# EAGLE board board_0.2v (EAGLE 7.7.0)
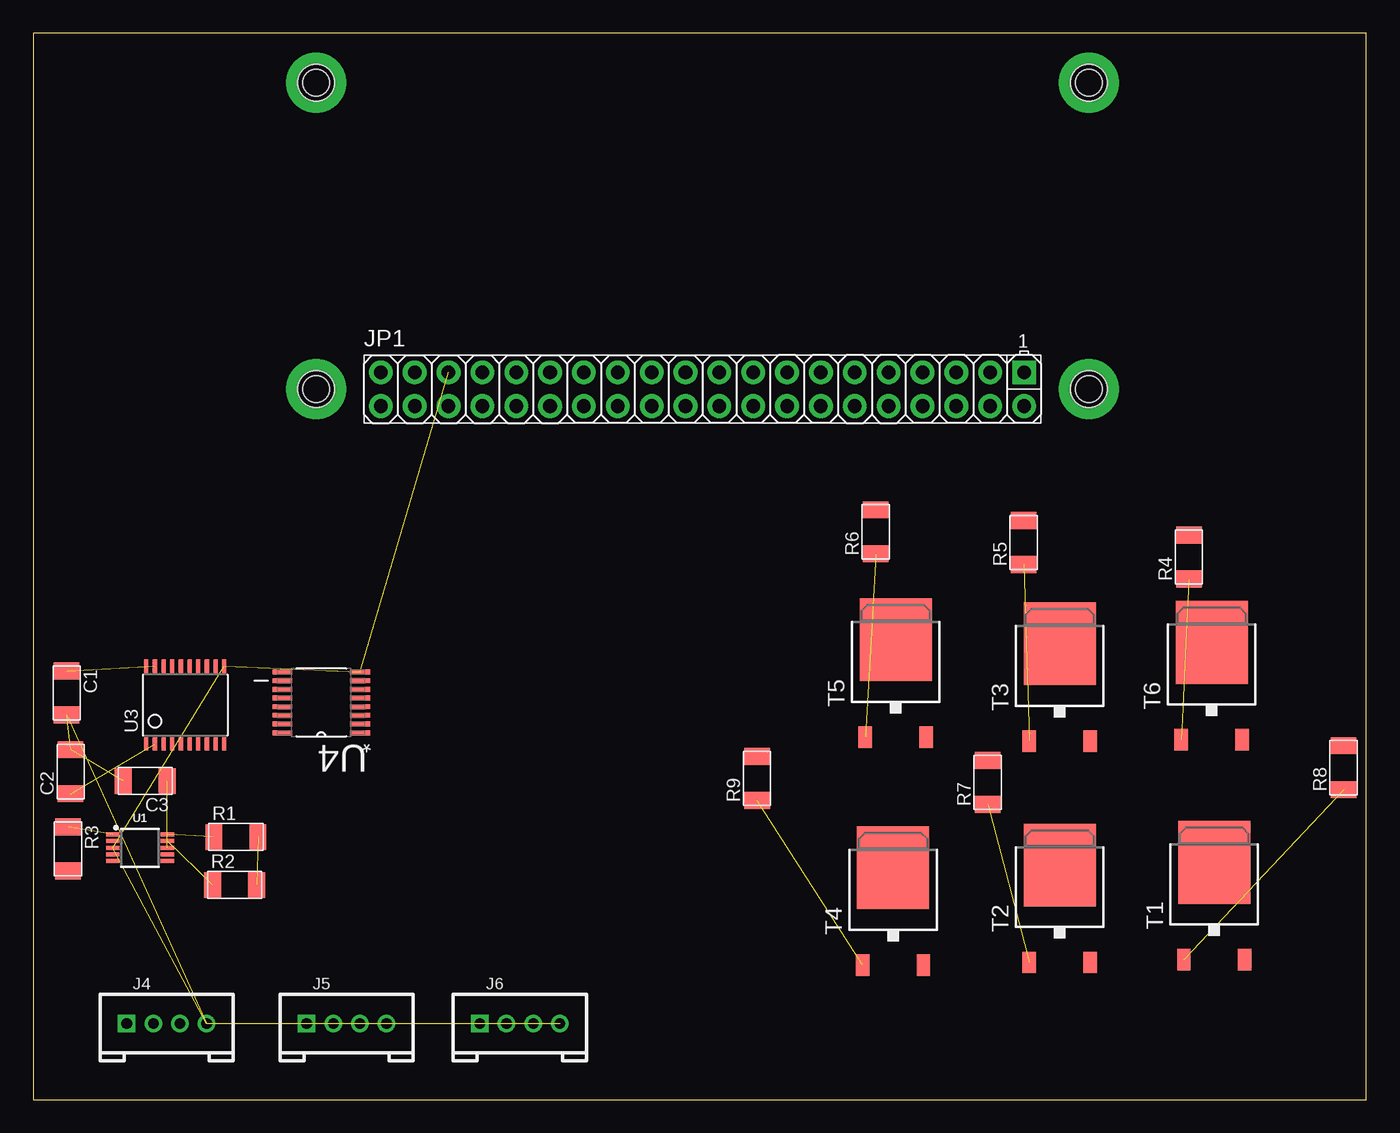
[diagram p0: board, top side]

Size 100 x 80 mm. Coordinates in mm from the lower left corner, seen from the top.
Outline: 0,0 100,0 100,80 0,80 0,0
Copper layers (1*16): Top 0.035mm / dielectric 1.5mm / Bottom 0.035mm
Design rules "default": minimum track width 10mil, minimum drill 24mil, track to track 8mil, track to pad 8mil, pad to pad 8mil, via to via 8mil, smd to smd 8mil, copper to edge 40mil, drill to drill 8mil, minimum pad ring 10mil, minimum via ring 8mil, stop-mask expansion 4mil, vias tented up to drill 0mil, thermal gap 10mil
Holes 2 mm at 21.2,76.3 21.2,53.3 79.2,76.3 79.2,53.3

## Footprints (pad centres in the part's own frame; a part is rotated, then mirrored left to right if it is on the bottom)
C1206FAB = smd 1.27 x 1.905: 1 -1.651,0; 2 1.651,0
HW4-2.0 = drill 0.8 pad 1.27 square: 1 -3,0 | drill 0.8 pad 1.27: 2 -1,0; 3 1,0; 4 3,0
2X20 = drill 1.016 octagon: 1 -24.13,-1.27; 2 -24.13,1.27; 3 -21.59,-1.27; 4 -21.59,1.27; 5 -19.05,-1.27; 6 -19.05,1.27; 7 -16.51,-1.27; 8 -16.51,1.27; 9 -13.97,-1.27; 10 -13.97,1.27; 11 -11.43,-1.27; 12 -11.43,1.27; 13 -8.89,-1.27; 14 -8.89,1.27; 15 -6.35,-1.27; 16 -6.35,1.27; 17 -3.81,-1.27; 18 -3.81,1.27; 19 -1.27,-1.27; 20 -1.27,1.27; 21 1.27,-1.27; 22 1.27,1.27; 23 3.81,-1.27; 24 3.81,1.27; 25 6.35,-1.27; 26 6.35,1.27; 27 8.89,-1.27; 28 8.89,1.27; 29 11.43,-1.27; 30 11.43,1.27; 31 13.97,-1.27; 32 13.97,1.27; 33 16.51,-1.27; 34 16.51,1.27; 35 19.05,-1.27; 36 19.05,1.27; 37 21.59,-1.27; 38 21.59,1.27; 39 24.13,-1.27; 40 24.13,1.27
R1206FAB = smd 1.27 x 1.905: 1 -1.651,0; 2 1.651,0
TO252 = smd 1 x 1.6: 1 -2.28,-4.8; 2 2.28,-4.8 | smd 5.4 x 6.2: 3 0,2.5
MSOP10 = smd 0.3 x 1: 1 -1,-2.05; 2 -0.5,-2.05; 3 0,-2.05; 4 0.5,-2.05; 5 1,-2.05; 6 1,2.05; 7 0.5,2.05; 8 0,2.05; 9 -0.5,2.05; 10 -1,2.05
TSSOP20 = smd 0.305 x 0.991: 1 -2.925,-2.918; 2 -2.275,-2.918; 3 -1.625,-2.918; 4 -0.975,-2.918; 5 -0.325,-2.918; 6 0.325,-2.918; 7 0.975,-2.918; 8 1.625,-2.918; 9 2.275,-2.918; 10 2.925,-2.918; 11 2.925,2.918; 12 2.275,2.918; 13 1.625,2.918; 14 0.975,2.918; 15 0.325,2.918; 16 -0.325,2.918; 17 -0.975,2.918; 18 -1.625,2.918; 19 -2.275,2.918; 20 -2.925,2.918
SOP65P640X110-16N = smd 1.473 x 0.356: 1 -2.921,2.286; 2 -2.921,1.626; 3 -2.921,0.965; 4 -2.921,0.33; 5 -2.921,-0.33; 6 -2.921,-0.965; 7 -2.921,-1.626; 8 -2.921,-2.286; 9 2.921,-2.286; 10 2.921,-1.626; 11 2.921,-0.965; 12 2.921,-0.33; 13 2.921,0.33; 14 2.921,0.965; 15 2.921,1.626; 16 2.921,2.286
RASPBERRYPI_BASTELSTUBE_V13_RASPI_BOARD_B+_FULL = drill 1 pad 1.778 square: 1 8.37,25.23 | drill 1 pad 1.778: 2 8.37,27.77; 3 10.91,25.23; 4 10.91,27.77; 5 13.45,25.23; 6 13.45,27.77; 7 15.99,25.23; 8 15.99,27.77; 9 18.53,25.23; 10 18.53,27.77; 11 21.07,25.23; 12 21.07,27.77; 13 23.61,25.23; 14 23.61,27.77; 15 26.15,25.23; 16 26.15,27.77; 17 28.69,25.23; 18 28.69,27.77; 19 31.23,25.23; 20 31.23,27.77; 21 33.77,25.23; 22 33.77,27.77; 23 36.31,25.23; 24 36.31,27.77; 25 38.85,25.23; 26 38.85,27.77; 27 41.39,25.23; 28 41.39,27.77; 29 43.93,25.23; 30 43.93,27.77; 31 46.47,25.23; 32 46.47,27.77; 33 49.01,25.23; 34 49.01,27.77; 35 51.55,25.23; 36 51.55,27.77; 37 54.09,25.23; 38 54.09,27.77; 39 56.63,25.23; 40 56.63,27.77 | hole 2.75: 3.5,3.5; 3.5,26.5; 61.5,3.5; 61.5,26.5

## Placement (x,y rotation side)
C1  CAP-US1206FAB  [C1206FAB]  2.5,30.5 270 top
C2  CAP-US1206FAB  [C1206FAB]  2.8,24.6 90 top
C3  CAP-US1206FAB  [C1206FAB]  8.4,23.9 180 top
J4  4P-2.0  [HW4-2.0]  10,5.7 0 top
J5  4P-2.0  [HW4-2.0]  23.5,5.7 0 top
J6  4P-2.0  [HW4-2.0]  36.5,5.7 0 top
JP1  [2X20]  50.2,53.3 0 top
R1  [R1206FAB]  15.2,19.7 0 top
R2  [R1206FAB]  15.1,16.1 0 top
R3  [R1206FAB]  2.6,18.8 270 top
R4  [R1206FAB]  86.7,40.7 90 top
R5  [R1206FAB]  74.3,41.8 90 top
R6  [R1206FAB]  63.2,42.6 90 top
R7  [R1206FAB]  71.6,23.8 90 top
R8  [R1206FAB]  98.3,24.9 90 top
R9  [R1206FAB]  54.3,24.1 90 top
T1  [TO252]  88.6,15.3 0 top
T2  [TO252]  77,15.1 0 top
T3  [TO252]  77,31.7 0 top
T4  [TO252]  64.5,14.9 0 top
T5  [TO252]  64.7,32 0 top
T6  [TO252]  88.4,31.8 0 top
U1  ADS1015  [MSOP10]  8,18.9 270 top
U3  [TSSOP20]  11.4,29.6 0 top
U4  PCA9546APW,112  [SOP65P640X110-16N]  21.6,29.8 180 top
U$1  RPI-ZERO  [RASPBERRYPI_BASTELSTUBE_V13_RASPI_BOARD_B+_FULL]  82.7,79.8 180 top

## Library data of the parts
C1-C3 R1-R9 = fab
J4-J6 = Seeed-OPL-Connector
JP1 U3 = adafruit
T1-T6 = fab_2
U1 = SparkFun-IC-Conversion; PROD_ID: IC-12270
U4 = NXP_By_element14_Batch_1; MPN: PCA9546APW,112; OC_FARNELL: 1831208; OC_NEWARK: 70R6610; PACKAGE: TSSOP-16; SUPPLIER: NXP
U$1 = RPI-Zero

## Nets
3,3V: JP1.1
3,3V_1: JP1.17
5V: JP1.2
CLK: JP1.7
GND: C1.2 C2.2 C3.2 J4.4 J5.4 J6.4 JP1.6 U1.3 U3.11 U4.8
GND_1: JP1.14
GND_2: JP1.9
GND_3: JP1.20
GND_4: JP1.25
GND_5: JP1.30
GND_6: JP1.34
GND_7: JP1.39
GPIO5: JP1.29
GPIO6: JP1.31
GPIO7: JP1.26
GPIO8: JP1.24
GPIO9: JP1.21
GPIO10: JP1.19
GPIO11: JP1.23
GPIO12: JP1.32
GPIO13: JP1.33
GPIO14: JP1.8
GPIO15: JP1.10
GPIO16: JP1.36
GPIO17: JP1.11
GPIO18: JP1.12
GPIO19: JP1.35
GPIO20: JP1.38
GPIO21: JP1.40
GPIO22: JP1.15
GPIO23: JP1.16
GPIO26: JP1.37
GPIO27: JP1.13
N$5: JP1.4
N$6: U3.9
N$7: U3.8
N$8: U3.7
N$9: U3.6
N$10: U3.5
N$11: U3.4
N$12: U3.3
N$13: U3.1
N$14: U3.10
N$15: U3.12
N$16: U3.13
N$17: U3.14
N$18: U3.15
N$19: U3.16
N$20: U3.17
N$21: U3.18
N$22: U3.20
N$23: JP1.18
N$24: C3.1 U1.8
N$25: JP1.22
N$26: C1.1 U3.19
N$27: C2.1 U3.2
N$28: R7.1 T2.1
N$29: R1.1 U1.10
N$30: JP1.27
N$31: R2.1 U1.9
N$32: R1.2 R2.2
N$33: R3.1 U1.1
N$34: R3.2
N$35: U1.4
N$36: U1.5
N$37: U1.6
N$38: JP1.28
N$39: U1.7
N$40: J6.3
N$41: J6.2
N$42: J6.1
N$43: J5.1
N$44: J5.2
N$45: J5.3
N$46: J4.3
N$47: J4.2
N$48: J4.1
N$49: U4.13
N$50: U4.2
N$51: U4.1
N$52: U4.11
N$53: U4.9
N$54: U4.6
N$55: U4.4
N$56: U4.12
N$57: U4.10
N$58: U4.7
N$59: U4.5
N$60: U4.14
N$61: U4.3
N$62: U4.16
N$63: U4.15
N$64: R6.1 T5.1
N$65: R8.1 T1.1
N$66: R9.1 T4.1
N$67: R5.1 T3.1
N$68: R4.1 T6.1
N$69: R5.2
N$70: R6.2
N$71: R7.2
N$72: R8.2
N$73: R9.2
N$74: R4.2
N$75: T2.3
N$76: T2.2
N$77: T1.3
N$78: T1.2
N$79: T5.2
N$80: T4.2
N$81: T3.2
N$82: T6.2
N$83: T3.3
N$84: T6.3
N$85: T5.3
N$86: T4.3
SDA: JP1.3
SDL: JP1.5

## Tracks (layer width: path | path; a pad name or v marks a point on that pad's centre or on a via)
GND  (9 unrouted)
N$1  (via drill 2.8 pad 4.5)
  other vias: 79.2,76.3
N$2  (via drill 2.8 pad 4.5)
  other vias: 21.2,76.3
N$3  (via drill 2.8 pad 4.5)
  other vias: 21.2,53.3
N$4  (via drill 2.8 pad 4.5)
  other vias: 79.2,53.3
N$24  (1 unrouted)
N$26  (1 unrouted)
N$27  (1 unrouted)
N$28  (1 unrouted)
N$29  (1 unrouted)
N$31  (1 unrouted)
N$32  (1 unrouted)
N$33  (1 unrouted)
N$64  (1 unrouted)
N$65  (1 unrouted)
N$66  (1 unrouted)
N$67  (1 unrouted)
N$68  (1 unrouted)